# Allegro board ExpansionBoard.brd
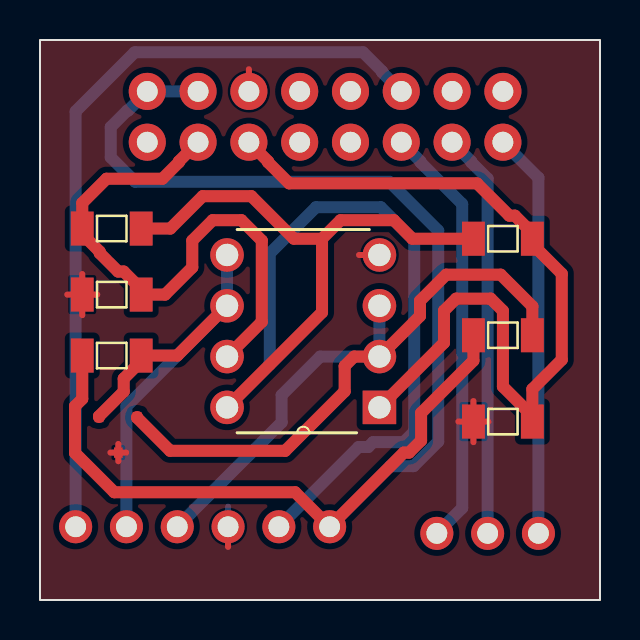
[diagram p0: board, top side]
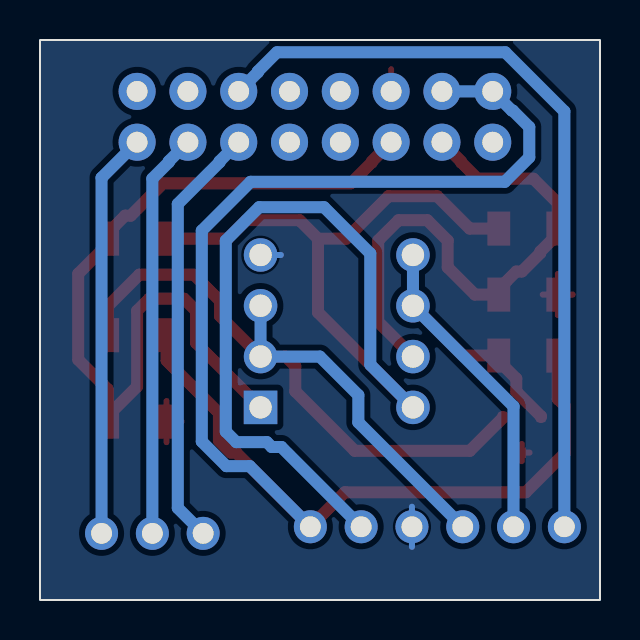
[diagram p1: board, bottom side, seen from below]

Outline 28 x 28 mm; copper layers: TOP, BOTTOM. Coordinates in mm from the lower left corner of the outline.
Outline path: rectangle 0,0 28,28

## Design rules (mm)
constraint set DEFAULT: min track width 0.6

## Placement (name value [footprint] x y rotation side)
C1  100p  [1206]  23.14 8.92 0 top
C2  100p  [1206]  3.59 15.27 0 top
D1  BAT54A/SOT  [SOT23]  3.92 8.26 270 top
J1  CON6  [MOLEXCON6_1MM]  15.75 6.2 270 top
J2  CONN SOCKET 8x2  [2X8SOCKET2_54]  4.09 26.7 270 bottom
J3  CON3  [MOLEXCON3_1MM]  18.57 0.79 90 top
R1  1k  [1206]  23.14 18.06 0 top
R2  1k  [1206]  3.59 18.57 180 top
R3  330  [1206]  23.14 13.24 0 top
R4  330  [1206]  3.59 12.22 0 top
U2  P82B96P  [DIP254P762X508-8]  9.35 17.25 180 top

## Library data of the parts
C1 C2 = CAP NP
D1 = BAT54A/SOT
J1 = CON6
J2 = CONN SOCKET 8x2: User Part Number: J*
J3 = CON3
R1-R4 = R
U2 = P82B96P

## Footprints (pads in the part's own frame, mm; a bottom-side part is the same pattern mirrored in y, then rotated)
2X8SOCKET2_54
  round 1.854 hole 1.041: 1(3.81,-1.27) 2(1.27,-1.27) 3(3.81,-3.81) 4(1.27,-3.81) 5(3.81,-6.35) 6(1.27,-6.35) 7(3.81,-8.89) 8(1.27,-8.89) 9(3.81,-11.43) 10(1.27,-11.43) 11(3.81,-13.97) 12(1.27,-13.97) 13(3.81,-16.51) 14(1.27,-16.51) 15(3.81,-19.05) 16(1.27,-19.05)
1206
  rect 1.143x1.702 smd: 1(-1.473,0) 2(1.473,0)
DIP254P762X508-8
  rect 1.676x1.676 hole 1.118: 1(-7.62,7.62)
  round 1.676 hole 1.118: 2(-7.62,5.08) 3(-7.62,2.54) 4(-7.62,0) 5(0,0) 6(0,2.54) 7(0,5.08) 8(0,7.62)
MOLEXCON3_1MM
  round 1.651 hole 1.041: 1(2.54,-1.27) 2(2.54,-3.81) 3(2.54,-6.35)
MOLEXCON6_1MM
  round 1.651 hole 1.041: 1(2.54,-1.27) 2(2.54,-3.81) 3(2.54,-6.35) 4(2.54,-8.89) 5(2.54,-11.43) 6(2.54,-13.97)
SOT23
  rect 0.508x0.432 smd: 1(-0.889,0.94) 2(-0.889,-0.965) 3(0.889,0)

## Nets
GND: C1.1 C2.1 D1.3 J1.3 J2.6 U2.4
VCC_3V3: J1.2 R1.1 R2.1 U2.8(VCC)
VIN: J1.1 J2.2 J2.4 R3.1 R4.1
LKEY: J2.11 J3.1
MOTOR: J1.6 J2.12
RKEY: J2.13 J3.2
SCL_3V3: C1.2 J2.5 R1.2 U2.1
SCL_5V: D1.1 J1.4 R3.2 U2.2 U2.3
SDA_3V3: C2.2 J2.3 R2.2 U2.7
SDA_5V: D1.2 J1.5 R4.2 U2.5 U2.6
SWC: J2.15 J3.3

Pads without a net: J2 1 7 8 9 10 14 16

## Routing (per net, layer and track width the routed paths; a pad name or vN(x,y) marks a point on that pad's centre or on a via; arc(x,y) is an arc through that point)
GND: length 14.9
  TOP w0.3: 20.92,8.92 C1.1 ; C1.1 21.67,9.95 ; C1.1 22.42,8.92 ; C1.1 21.67,7.89 ; 15.96,17.25 U2.4 ; C2.1 2.11,16.3 ; C2.1 2.11,14.24 ; C2.1 1.36,15.27 ; C2.1 2.86,15.27 ; J2.6 10.44,26.54 ; 3.52,7.37 D1.3 ; D1.3 3.92,7.8 ; D1.3 3.92,6.94 ; D1.3 4.31,7.37 ; 9.4,2.66 J1.3
  BOTTOM w0.3: 9.4,4.67 J1.3 9.4,2.66 ; 15.96,17.25 U2.4
VCC_3V3: length 65.1
  TOP w0.6: R2.1 6.52,18.57 8.13,20.19 10.57,20.19 12.69,18.06 14.1,18.06 ; R1.1 18.62,18.06 17.69,18.99 15.03,18.99 14.1,18.06 ; 14.1,18.06 14.1,14.38 U2.8
  BOTTOM w0.6: U2.8 11.49,11.76 11.49,17.33 13.8,19.64 17.04,19.64 18.71,17.97 18.71,8.42 18.18,7.89 16.66,7.89 16.41,7.65 15.93,7.65 J1.2
VIN: length 74.2
  TOP w0.6: R3.1 21.67,11.97 19.05,9.35 19.05,7.97 18.45,7.37 18.19,7.37 J1.1 12.76,5.39 3.71,5.39 1.75,7.35 1.75,9.69 2.11,10.05 R4.1
  BOTTOM w0.6: J1.1 17.51,6.69 18.68,6.69 19.91,7.92 19.91,18.47 17.47,20.91 4.76,20.91 3.54,22.13 3.54,23.65 4.36,24.47 4.41,24.47 J2.2 J2.4
LKEY: length 21.3
  BOTTOM w0.6: J2.11 19.02,21.93 19.02,21.89 21.11,19.8 21.11,4.6 J3.1
MOTOR: length 39.1
  BOTTOM w0.6: J2.12 17.11,26.39 17.11,26.43 16.15,27.39 4.74,27.39 1.78,24.43 J1.6
RKEY: length 20.3
  BOTTOM w0.6: J2.13 21.56,21.93 21.56,21.89 22.38,21.07 J3.2
SCL_3V3: length 42.2
  TOP w0.6: 24.62,9.2 24.62,10.54 26.09,12.01 26.09,16.31 24.62,17.78 R1.2 24.62,18.34 23.74,19.22 23.46,19.22 21.85,20.83 12.46,20.83 11.4,21.89 11.4,21.93 J2.5 ; 24.62,9.2 23.15,10.67 23.15,14.46 22.54,15.07 20.8,15.07 20.2,14.46 20.2,12.86 U2.1 ; 24.62,9.2 C1.2
SCL_5V: length 44.4
  TOP w0.6: D1.1 4.86,9.11 6.51,7.46 12.26,7.46 15.23,10.43 15.23,11.7 15.71,12.17 U2.2 19,14.2 19,14.96 20.31,16.27 23.03,16.27 24.62,14.68 R3.2
  BOTTOM w0.6: U2.3 U2.2 14.01,12.17 12.08,10.24 12.08,8.88 J1.4
SDA_3V3: length 28.3
  TOP w0.6: U2.7 11.09,13.91 11.09,17.97 10.07,18.99 8.63,18.99 7.61,17.97 7.61,16.63 6.25,15.27 C2.2 5.06,15.55 4.19,16.42 3.91,16.42 2.99,17.34 2.99,17.42 2.11,18.29 R2.2 2.11,19.85 3.33,21.06 6.12,21.06 6.95,21.89 6.95,21.93 J2.3
SDA_5V: length 24.9
  TOP w0.6: D1.2 2.95,9.19 4.19,10.42 4.19,11.07 5.06,11.94 R4.2 6.86,12.22 U2.6
  BOTTOM w0.6: J1.5 4.32,9.68 U2.6 U2.5
SWC: length 20.3
  BOTTOM w0.6: J3.3 24.92,21.11 J2.15

## Copper pours and planes (outline as drawn; the poured copper is in the pictures)
GND on TOP, BOTTOM: 0,28 28,28 28,0 0,0
